# Altium PCB msr50.PcbDoc (part 6 of 8)
Units mil, origin at the board's own origin, x right, y up, seen from the top; angles counter-clockwise.
Board outline 3925 x 3925 mil, 2 copper layers (TopLayer, BottomLayer); 109 components, 122 nets, 846 pads, 52 vias.
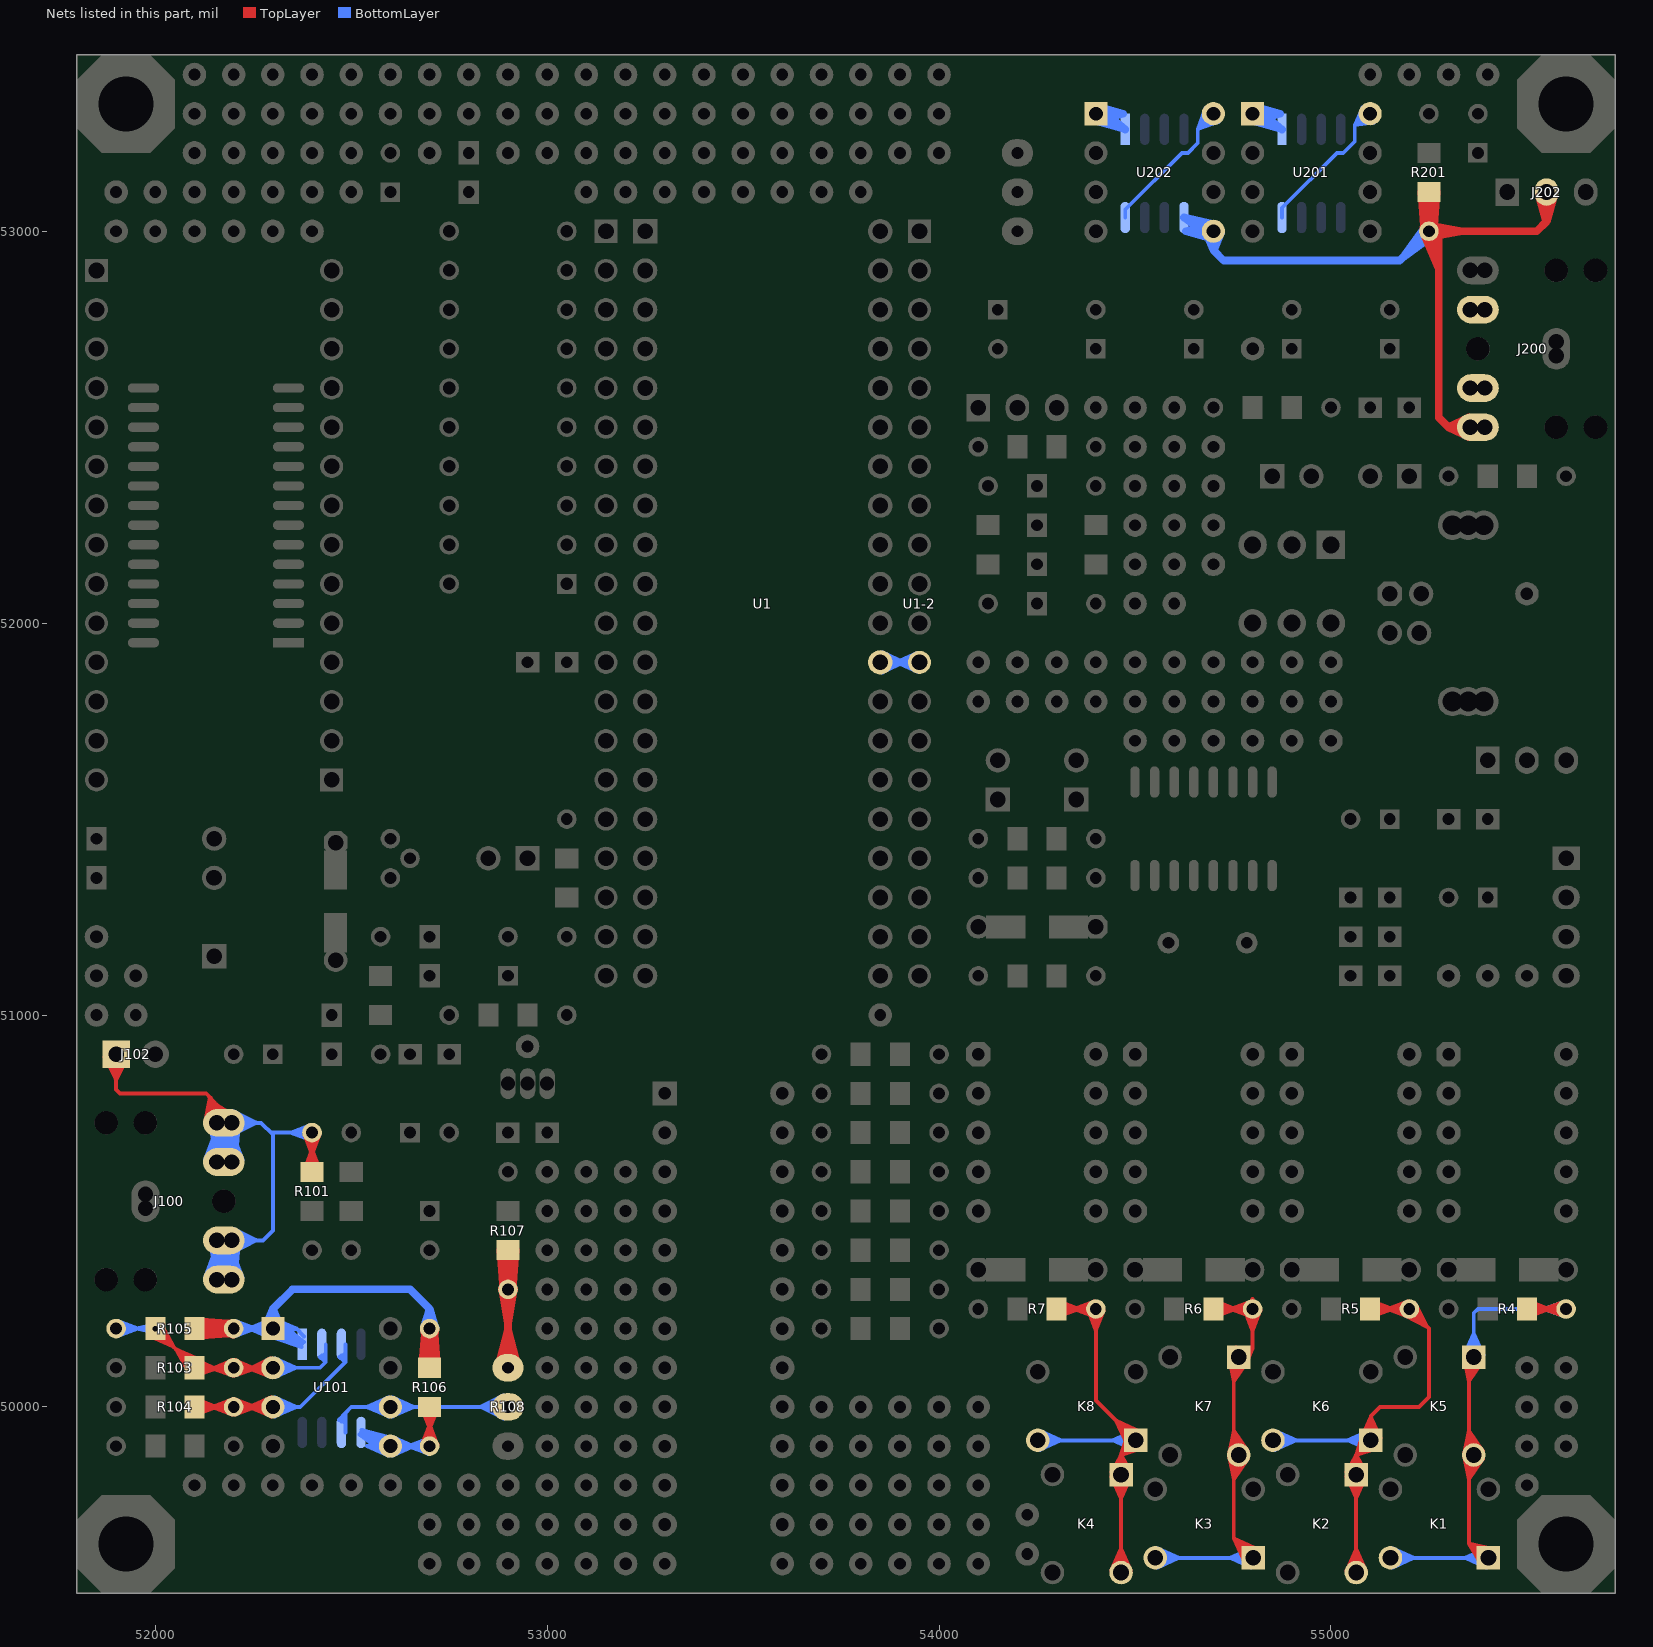
[diagram p6: the nets of this part, all layers, seen from the top]

## Via types
v1: diameter 30, hole 14, TopLayer to BottomLayer, 40 vias
v2: diameter 50, hole 28, TopLayer to BottomLayer, 12 vias

## Nets (pads, with @x,y where several pads share a name; then routed paths per layer and width w, separated by ;. In a path a pad name is that pad's centre, name@x,y a point inside that pad or via, vN(x,y) a via of type N, cw(c..) or ccw(c..) an arc to the next point about the centre after c; other vN are vias at no path point) (continued)
NetJ100_2: (continued)
  BottomLayer w10: J100.4@52164.96,50428.92 52191.14,50368.08 ; J100.2@52164.96,50728.92 52189.05,50672.29 ; J100.2@52164.96,50728.92 52189.08,50672.14 ; J100.2@52164.96,50728.92 52191.14,50668.08 ; 52165.25,50382.86 J100.5@52165.89,50324.46 ; 52165.25,50682.86 J100.3@52165.89,50624.46 ; J100.5@52165.34,50341.79 J100.5@52187.43,50320.87 ; J100.5@52165.36,50341.78 J100.5@52187.47,50320.8 ; J100.5@52165.34,50341.79 J100.5@52187.44,50320.85 ; J100.3@52165.34,50641.79 J100.3@52187.43,50620.87 ; J100.3@52165.36,50641.78 J100.3@52187.47,50620.8 ; J100.3@52165.34,50641.79 J100.3@52187.44,50620.85 ; J100.4@52165.42,50427.85 52181.25,50369.58 ; J100.4@52165.41,50427.87 52181.27,50370.06 ; J100.4@52165.42,50427.85 52180.44,50371.92 ; J100.2@52165.42,50727.85 52181.25,50669.58 ; J100.2@52165.41,50727.87 52181.27,50670.06 ; J100.2@52165.42,50727.85 52180.44,50671.92 ; 52165.6,50374.94 52165.88,50324.31 52165.6,50374.94 ; 52165.6,50374.94 52175.9,50325.37 52165.6,50374.94 ; 52165.6,50374.94 52139.79,50331.39 52165.6,50374.94 ; 52165.6,50374.94 J100.5A@52195,50325 ; 52165.6,50374.94 J100.5@52187.26,50321.19 ; 52165.6,50674.94 52165.88,50624.31 52165.6,50674.94 ; 52165.6,50674.94 52175.9,50625.37 52165.6,50674.94 ; 52165.6,50674.94 52139.79,50631.39 52165.6,50674.94 ; 52165.6,50674.94 J100.3A@52195,50625 ; 52165.6,50674.94 J100.3@52187.26,50621.19 ; J100.5@52165.65,50322.9 52174.92,50377.54 ; J100.5@52165.65,50322.91 52175.55,50380.35 ; J100.5@52165.65,50322.91 52175.55,50380.35 ; J100.5@52165.65,50322.91 52174.89,50377.66 ; J100.5@52165.65,50322.91 52174.89,50377.66 ; J100.3@52165.65,50622.9 52174.92,50677.54 ; J100.3@52165.65,50622.91 52175.55,50680.35 ; J100.3@52165.65,50622.91 52175.55,50680.35 ; J100.3@52165.65,50622.91 52174.89,50677.66 ; J100.3@52165.65,50622.91 52174.89,50677.66 ; 52165.76,50379.83 52165.88,50324.35 52165.76,50379.83 ; 52165.76,50379.83 52175.9,50325.28 52165.76,50379.83 ; 52165.76,50379.83 52139.62,50330.89 52165.76,50379.83 ; 52165.76,50379.83 J100.5A@52195,50325 ; 52165.76,50379.83 J100.5@52187.13,50321.48 ; 52165.76,50379.83 52209.93,50336.12 52169.09,50375.68 ; 52165.76,50679.83 52165.88,50624.35 52165.76,50679.83 ; 52165.76,50679.83 52175.9,50625.28 52165.76,50679.83 ; 52165.76,50679.83 52139.62,50630.89 52165.76,50679.83 ; 52165.76,50679.83 J100.3A@52195,50625 ; 52165.76,50679.83 J100.3@52187.13,50621.48 ; 52165.76,50679.83 52209.93,50636.12 52169.09,50675.68 ; J100.5@52165.79,50323.62 52169.98,50376.33 ; J100.5@52165.79,50323.62 52169.98,50376.33 ; J100.5@52165.79,50323.58 52171.06,50381.53 ; J100.5@52165.79,50323.58 52171.06,50381.53 ; J100.5@52165.79,50323.61 52171.01,50382.36 ; J100.3@52165.79,50623.62 52169.98,50676.33 ; J100.3@52165.79,50623.62 52169.98,50676.33 ; J100.3@52165.79,50623.58 52171.06,50681.53 ; J100.3@52165.79,50623.58 52171.06,50681.53 ; J100.3@52165.79,50623.61 52171.01,50682.36 ; J100.5@52165.84,50323.95 52168.28,50379.15 ; J100.5@52165.84,50323.95 52168.28,50379.15 ; J100.5@52165.84,50323.97 52167.7,50375.34 ; J100.5@52165.84,50323.97 52167.7,50375.34 ; J100.4@52165.84,50426.05 52168.28,50370.85 ; J100.4@52165.84,50426.05 52168.28,50370.85 ; J100.4@52165.84,50426.03 52167.7,50374.66 ; J100.4@52165.84,50426.03 52167.7,50374.66 ; J100.3@52165.84,50623.95 52168.28,50679.15 ; J100.3@52165.84,50623.95 52168.28,50679.15 ; J100.3@52165.84,50623.97 52167.7,50675.34 ; J100.3@52165.84,50623.97 52167.7,50675.34 ; J100.2@52165.84,50726.05 52168.28,50670.85 ; J100.2@52165.84,50726.05 52168.28,50670.85 ; J100.2@52165.84,50726.03 52167.7,50674.66 ; J100.2@52165.84,50726.03 52167.7,50674.66 ; 52166.76,50368.31 52165.87,50425.78 52166.76,50368.31 ; 52166.76,50368.31 52139.66,50418.99 52166.76,50368.31 ; 52166.76,50368.31 52175.91,50425.06 52166.76,50368.31 ; 52166.76,50368.31 J100.4A@52195,50425 ; 52166.76,50368.31 J100.4@52187.04,50428.31 ; 52166.76,50368.31 52202.44,50420.64 52168.28,50370.85 ; 52166.76,50368.31 52177.29,50430.76 52168.72,50374.15 ; 52166.76,50668.31 52165.87,50725.78 52166.76,50668.31 ; 52166.76,50668.31 52139.66,50718.99 52166.76,50668.31 ; 52166.76,50668.31 52175.91,50725.06 52166.76,50668.31 ; 52166.76,50668.31 J100.2A@52195,50725 ; 52166.76,50668.31 J100.2@52187.04,50728.31 ; 52166.76,50668.31 52202.44,50720.64 52168.28,50670.85 ; 52166.76,50668.31 52177.29,50730.76 52168.72,50674.15 ; 52167.7,50374.66 52149.02,50422.55 52167.7,50374.66 ; 52167.7,50374.66 52140.03,50417.98 52167.7,50374.66 ; 52167.7,50374.66 52175.9,50425.41 52167.7,50374.66 ; 52167.7,50374.66 J100.4A@52195,50425 ; 52167.7,50374.66 J100.4@52187.13,50428.53 ; 52167.7,50375.34 52149.02,50327.45 52167.7,50375.34 ; 52167.7,50375.34 52175.9,50324.59 52167.7,50375.34 ; 52167.7,50375.34 52140.03,50332.02 52167.7,50375.34 ; 52167.7,50375.34 J100.5A@52195,50325 ; 52167.7,50375.34 J100.5@52187.13,50321.47 ; 52167.7,50674.66 52149.02,50722.55 52167.7,50674.66 ; 52167.7,50674.66 52140.03,50717.98 52167.7,50674.66 ; 52167.7,50674.66 52175.9,50725.41 52167.7,50674.66 ; 52167.7,50674.66 J100.2A@52195,50725 ; 52167.7,50674.66 J100.2@52187.13,50728.53 ; 52167.7,50675.34 52149.02,50627.45 52167.7,50675.34 ; 52167.7,50675.34 52175.9,50624.59 52167.7,50675.34 ; 52167.7,50675.34 52140.03,50632.02 52167.7,50675.34 ; 52167.7,50675.34 J100.3A@52195,50625 ; 52167.7,50675.34 J100.3@52187.13,50621.47 ; 52168.28,50370.85 52139.92,50418.27 52168.28,50370.85 ; 52168.28,50370.85 52175.9,50425.58 52168.28,50370.85 ; 52168.28,50370.85 J100.4A@52195,50425 ; 52168.28,50370.85 J100.4@52187.02,50428.25 ; 52168.28,50379.15 52175.9,50324.42 52168.28,50379.15 ; 52168.28,50379.15 52139.92,50331.73 52168.28,50379.15 ; 52168.28,50379.15 J100.5A@52195,50325 ; 52168.28,50379.15 52202.44,50329.36 52169.98,50376.33 ; 52168.28,50379.15 J100.5@52187.02,50321.75 ; 52168.28,50670.85 52139.92,50718.27 52168.28,50670.85 ; 52168.28,50670.85 52175.9,50725.58 52168.28,50670.85 ; 52168.28,50670.85 J100.2A@52195,50725 ; 52168.28,50670.85 J100.2@52187.02,50728.25 ; 52168.28,50679.15 52175.9,50624.42 52168.28,50679.15 ; 52168.28,50679.15 52139.92,50631.73 52168.28,50679.15 ; 52168.28,50679.15 J100.3A@52195,50625 ; 52168.28,50679.15 52202.44,50629.36 52169.98,50676.33 ; 52168.28,50679.15 J100.3@52187.02,50621.75 ; 52168.72,50374.15 52149.06,50422.42 52168.72,50374.15 ; 52168.72,50374.15 52165.82,50426.19 52168.72,50374.15 ; 52168.72,50374.15 52140.14,50417.73 52168.72,50374.15 ; 52168.72,50374.15 52175.89,50425.77 52168.72,50374.15 ; 52168.72,50374.15 J100.4A@52195,50425 ; 52168.72,50374.15 J100.4@52187.06,50428.37 ; 52168.72,50674.15 52149.06,50722.42 52168.72,50674.15 ; 52168.72,50674.15 52165.82,50726.19 52168.72,50674.15 ; 52168.72,50674.15 52140.14,50717.73 52168.72,50674.15 ; 52168.72,50674.15 52175.89,50725.77 52168.72,50674.15 ; 52168.72,50674.15 J100.2A@52195,50725 ; 52168.72,50674.15 J100.2@52187.06,50728.37 ; 52169.09,50375.68 52165.81,50323.75 52169.09,50375.68 ; 52169.09,50375.68 52175.88,50324.09 52169.09,50375.68 ; 52169.09,50375.68 52140.2,50332.4 52169.09,50375.68 ; 52169.09,50375.68 J100.5A@52195,50325 ; 52169.09,50375.68 J100.5@52187.05,50321.67 ; 52169.09,50675.68 52165.81,50623.75 52169.09,50675.68 ; 52169.09,50675.68 52175.88,50624.09 52169.09,50675.68 ; 52169.09,50675.68 52140.2,50632.4 52169.09,50675.68 ; 52169.09,50675.68 J100.3A@52195,50625 ; 52169.09,50675.68 J100.3@52187.05,50621.67 ; J100.4@52169.49,50404.1 J100.5@52175,50325 ; J100.4@52169.49,50404.1 J100.5@52185.34,50326.41 ; J100.2@52169.49,50704.1 J100.3@52175,50625 ; J100.2@52169.49,50704.1 J100.3@52185.34,50626.41 ; 52169.69,50378.15 52149.07,50327.62 52171.01,50382.36 ; 52169.69,50678.15 52149.07,50627.62 52171.01,50682.36 ; 52169.98,50376.33 52149.11,50327.75 52169.98,50376.33 ; 52169.98,50376.33 52175.87,50323.78 52169.98,50376.33 ; 52169.98,50376.33 52140.28,50332.59 52169.98,50376.33 ; 52169.98,50376.33 J100.5A@52195,50325 ; 52169.98,50376.33 J100.5@52186.99,50321.82 ; 52169.98,50676.33 52149.11,50627.75 52169.98,50676.33 ; 52169.98,50676.33 52175.87,50623.78 52169.98,50676.33 ; 52169.98,50676.33 52140.28,50632.59 52169.98,50676.33 ; 52169.98,50676.33 J100.3A@52195,50625 ; 52169.98,50676.33 J100.3@52186.99,50621.82 ; 52170.33,50379.86 52165.8,50323.65 52170.33,50379.86 ; 52170.33,50379.86 52149.07,50327.63 52170.33,50379.86 ; 52170.33,50379.86 52175.86,50323.74 52170.33,50379.86 ; 52170.33,50379.86 J100.5A@52195,50325 ; 52170.33,50379.86 J100.5@52186.9,50322.04 ; 52170.33,50679.86 52165.8,50623.65 52170.33,50679.86 ; 52170.33,50679.86 52149.07,50627.63 52170.33,50679.86 ; 52170.33,50679.86 52175.86,50623.74 52170.33,50679.86 ; 52170.33,50679.86 J100.3A@52195,50625 ; 52170.33,50679.86 J100.3@52186.9,50622.04 ; 52171.06,50364.9 J100.4A@52195,50425 ; 52171.06,50364.9 J100.4@52186.8,50427.65 ; 52171.06,50381.53 52175.85,50323.54 52171.06,50381.53 ; 52171.06,50381.53 J100.5A@52195,50325 ; 52171.06,50381.53 52202.68,50328.91 52173.67,50376.54 ; 52171.06,50381.53 J100.5@52186.84,50322.2 ; 52171.06,50664.9 J100.2A@52195,50725 ; 52171.06,50664.9 J100.2@52186.8,50727.65 ; 52171.06,50681.53 52175.85,50623.54 52171.06,50681.53 ; 52171.06,50681.53 J100.3A@52195,50625 ; 52171.06,50681.53 52202.68,50628.91 52173.67,50676.54 ; 52171.06,50681.53 J100.3@52186.84,50622.2 ; 52171.36,50368.23 52149.09,50422.31 52172.17,50365.72 ; 52171.36,50668.23 52149.09,50722.31 52172.17,50665.72 ; 52171.54,50371.29 52149.15,50422.15 J100.5@52176.13,50358.42 ; 52171.54,50671.29 52149.15,50722.15 J100.3@52176.13,50658.42 ; 52173.05,50381.71 52165.74,50323.31 J100.4@52177.71,50405.04 ; 52173.05,50681.71 52165.74,50623.31 J100.2@52177.71,50705.04 ; 52173.34,50373.76 52149.29,50421.77 52173.34,50373.76 ; 52173.34,50373.76 52165.69,50426.91 52173.34,50373.76 ; 52173.34,50373.76 52140.75,50416.43 52173.34,50373.76 ; 52173.34,50373.76 52175.75,50427.4 52173.34,50373.76 ; 52173.34,50373.76 J100.4A@52195,50425 ; 52173.34,50373.76 J100.4@52186.82,50427.73 ; 52173.34,50673.76 52149.29,50721.77 52173.34,50673.76 ; 52173.34,50673.76 52165.69,50726.91 52173.34,50673.76 ; 52173.34,50673.76 52140.75,50716.43 52173.34,50673.76 ; 52173.34,50673.76 52175.75,50727.4 52173.34,50673.76 ; 52173.34,50673.76 J100.2A@52195,50725 ; 52173.34,50673.76 J100.2@52186.82,50727.73 ; 52173.67,50376.54 52165.68,50323.05 52173.67,50376.54 ; 52173.67,50376.54 52149.3,50328.26 52173.67,50376.54 ; 52173.67,50376.54 52175.74,50322.5 52173.67,50376.54 ; 52173.67,50376.54 J100.5A@52195,50325 ; 52173.67,50376.54 J100.5@52186.8,50322.33 ; 52173.67,50676.54 52165.68,50623.05 52173.67,50676.54 ; 52173.67,50676.54 52149.3,50628.26 52173.67,50676.54 ; 52173.67,50676.54 52175.74,50622.5 52173.67,50676.54 ; 52173.67,50676.54 J100.3A@52195,50625 ; 52173.67,50676.54 J100.3@52186.8,50622.33 ; 52174.92,50377.54 J100.5@52175.68,50322.13 ; 52174.89,50377.66 J100.5@52175.68,50322.14 ; 52174.89,50377.66 J100.5@52175.68,50322.14 ; 52174.89,50377.66 J100.5A@52195,50325 ; 52174.89,50377.66 J100.5@52186.73,50322.55 ; 52174.92,50677.54 J100.3@52175.68,50622.13 ; 52174.89,50677.66 J100.3@52175.68,50622.14 ; 52174.89,50677.66 J100.3@52175.68,50622.14 ; 52174.89,50677.66 J100.3A@52195,50625 ; 52174.89,50677.66 J100.3@52186.73,50622.55 ; J100.5@52175,50325 J100.4@52177.71,50405.04 ; J100.5@52175,50325 J100.4@52186.2,50404.66 ; J100.4@52175,50425 J100.4A@52195,50425 ; J100.3@52175,50625 J100.2@52177.71,50705.04 ; J100.3@52175,50625 J100.2@52186.2,50704.66 ; J100.2@52175,50725 J100.2A@52195,50725 ; 52175.55,50380.35 52149.32,50328.3 52175.55,50380.35 ; 52175.55,50380.35 52175.67,50322.07 52175.55,50380.35 ; 52175.55,50380.35 J100.5A@52195,50325 ; 52175.55,50380.35 J100.5@52186.68,50322.75 ; 52175.55,50680.35 52149.32,50628.3 52175.55,50680.35 ; 52175.55,50680.35 52175.67,50622.07 52175.55,50680.35 ; 52175.55,50680.35 J100.3A@52195,50625 ; 52175.55,50680.35 J100.3@52186.68,50622.75 ; 52176.25,50361.98 J100.4A@52195,50425 ; 52176.25,50661.98 J100.2A@52195,50725 ; 52176.47,50370.43 52175.62,50428.27 52176.71,50368.7 ; 52176.47,50670.43 52175.62,50728.27 52176.71,50668.7 ; 52176.91,50381.32 52165.61,50322.76 52176.95,50380.93 ; 52176.91,50681.32 52165.61,50622.76 52176.95,50680.93 ; 52176.96,50382.89 J100.5A@52195,50325 ; 52176.96,50682.89 J100.3A@52195,50625 ; 52177.25,50372.26 52149.48,50421.34 52177.25,50372.26 ; 52177.25,50372.26 52165.56,50427.43 52177.25,50372.26 ; 52177.25,50372.26 52141.2,50415.62 52177.25,50372.26 ; 52177.25,50372.26 52175.55,50428.63 52177.25,50372.26 ; 52177.25,50372.26 J100.4A@52195,50425 ; 52177.25,50372.26 J100.4@52186.64,50427.11 ; 52177.25,50672.26 52149.48,50721.34 52177.25,50672.26 ; 52177.25,50672.26 52165.56,50727.43 52177.25,50672.26 ; 52177.25,50672.26 52141.2,50715.62 52177.25,50672.26 ; 52177.25,50672.26 52175.55,50728.63 52177.25,50672.26 ; 52177.25,50672.26 J100.2A@52195,50725 ; 52177.25,50672.26 J100.2@52186.64,50727.11 ; J100.4@52177.71,50405.04 J100.5@52185.43,50325.33 ; J100.2@52177.71,50705.04 J100.3@52185.43,50625.33 ; 52178.5,50376.79 52165.49,50322.36 52178.6,50377.34 ; 52178.5,50376.79 52175.45,50320.9 52178.6,50377.34 ; 52178.5,50676.79 52165.49,50622.36 52178.6,50677.34 ; 52178.5,50676.79 52175.45,50620.9 52178.6,50677.34 ; 52178.6,50377.34 J100.5A@52195,50325 ; 52178.6,50677.34 J100.3A@52195,50625 ; 52179.28,50369.54 52165.51,50427.59 52181.97,50361.01 ; 52179.28,50369.54 52141.26,50415.52 52182.68,50363.86 ; 52179.28,50669.54 52165.51,50727.59 52181.97,50661.01 ; 52179.28,50669.54 52141.26,50715.52 52182.68,50663.86 ; 52179.36,50367.87 J100.4A@52195,50425 ; 52179.36,50667.87 J100.2A@52195,50725 ; 52180.25,50378.8 52141.54,50334.94 52180.95,50380.03 ; 52180.25,50378.8 J100.5A@52195,50325 ; 52180.25,50678.8 52141.54,50634.94 52180.95,50680.03 ; 52180.25,50678.8 J100.3A@52195,50625 ; 52180.99,50380.64 J100.5A@52195,50325 ; 52180.99,50680.64 J100.3A@52195,50625 ; 52181.25,50369.58 52149.63,50421.02 52181.27,50370.06 ; 52181.25,50369.58 52175.31,50429.67 52182.68,50363.86 ; 52181.25,50669.58 52149.63,50721.02 52181.27,50670.06 ; 52181.25,50669.58 52175.31,50729.67 52182.68,50663.86 ; 52181.3,50369.77 J100.4A@52195,50425 ; 52181.3,50669.77 J100.2A@52195,50725 ; J100.5@52182.09,50359.79 J100.4A@52195,50425 ; J100.3@52182.09,50659.79 J100.2A@52195,50725 ; 52182.71,50379.79 52149.74,50329.18 52182.8,50379.75 ; 52182.71,50379.79 52141.8,50335.35 52182.8,50379.75 ; 52182.71,50679.79 52149.74,50629.18 52182.8,50679.75 ; 52182.71,50679.79 52141.8,50635.35 52182.8,50679.75 ; 52182.74,50375.33 52165.25,50321.71 52183.81,50378.01 ; 52182.74,50675.33 52165.25,50621.71 52183.81,50678.01 ; 52183.26,50383.76 J100.5A@52195,50325 ; 52183.26,50383.76 52186.45,50323.92 52183.81,50378.01 ; 52183.26,50683.76 J100.3A@52195,50625 ; 52183.26,50683.76 52186.45,50623.92 52183.81,50678.01 ; 52183.81,50378.01 J100.5A@52195,50325 ; 52183.81,50678.01 J100.3A@52195,50625 ; 52183.9,50374.71 52174.95,50430.9 52185.24,50370.97 ; 52183.9,50674.71 52174.95,50730.9 52185.24,50670.97 ; 52184.45,50370.8 52165.25,50428.31 52186.92,50364.23 ; 52184.45,50670.8 52165.25,50728.31 52186.92,50664.23 ; 52184.78,50368.55 J100.4A@52195,50425 ; 52184.78,50668.55 J100.2A@52195,50725 ; J100.5@52185.4,50324.22 J100.4@52186.2,50404.66 ; J100.3@52185.4,50624.22 J100.2@52186.2,50704.66 ; 52185.8,50378.73 52165.17,50321.51 52185.94,50378.56 ; 52185.8,50678.73 52165.17,50621.51 52185.94,50678.56 ; 52185.83,50367.34 J100.4A@52195,50425 ; 52185.83,50667.34 J100.2A@52195,50725 ; 52185.94,50378.56 52149.99,50329.6 52186.18,50378.67 ; 52185.95,50379.6 J100.5A@52195,50325 ; 52185.94,50678.56 52149.99,50629.6 52186.18,50678.67 ; 52185.95,50679.6 J100.3A@52195,50625 ; 52186.55,50380.7 J100.5A@52195,50325 ; 52186.55,50680.7 J100.3A@52195,50625 ; J100.5@52186.8,50322.33 52157.76,50316.39 J100.5@52186.84,50322.2 ; J100.4@52186.8,50427.65 52159.3,50416.62 J100.4@52186.82,50427.73 ; J100.4@52186.8,50427.65 52157.77,50433.61 J100.4@52186.82,50427.73 ; J100.3@52186.8,50622.33 52157.76,50616.39 J100.3@52186.84,50622.2 ; J100.2@52186.8,50727.65 52159.3,50716.62 J100.2@52186.82,50727.73 ; J100.2@52186.8,50727.65 52157.77,50733.61 J100.2@52186.82,50727.73 ; J100.5@52187.02,50321.75 52157.59,50316.38 J100.5@52186.99,50321.82 ; J100.4@52187.02,50428.25 52159.45,50416.65 J100.4@52187.04,50428.31 ; J100.3@52187.02,50621.75 52157.59,50616.38 J100.3@52186.99,50621.82 ; J100.2@52187.02,50728.25 52159.45,50716.65 J100.2@52187.04,50728.31 ; J100.4@52187.04,50428.31 52157.57,50433.62 J100.4@52187.06,50428.37 ; J100.4@52187.04,50428.31 52165,50408.05 J100.4@52187.06,50428.37 ; J100.4@52187.06,50428.37 52159.48,50416.66 J100.4@52187.13,50428.53 ; J100.2@52187.04,50728.31 52157.57,50733.62 J100.2@52187.06,50728.37 ; J100.2@52187.04,50728.31 52165,50708.05 J100.2@52187.06,50728.37 ; J100.2@52187.06,50728.37 52159.48,50716.66 J100.2@52187.13,50728.53 ; J100.5@52187.13,50321.47 52157.51,50316.38 J100.5@52187.13,50321.48 ; J100.5@52187.13,50321.47 52159.51,50333.33 J100.5@52187.13,50321.48 ; J100.5@52187.13,50321.47 52160.93,50306.74 J100.5@52187.13,50321.48 ; J100.5@52187.13,50321.47 52165.09,50341.91 J100.5@52187.13,50321.48 ; J100.3@52187.13,50621.47 52157.51,50616.38 J100.3@52187.13,50621.48 ; J100.3@52187.13,50621.47 52159.51,50633.33 J100.3@52187.13,50621.48 ; J100.3@52187.13,50621.47 52160.93,50606.74 J100.3@52187.13,50621.48 ; J100.3@52187.13,50621.47 52165.09,50641.91 J100.3@52187.13,50621.48 ; J100.5@52187.26,50321.19 52159.58,50333.31 J100.5@52187.32,50321.09 ; J100.3@52187.26,50621.19 52159.58,50633.31 J100.3@52187.32,50621.09 ; 52187.28,50376.78 52150.15,50329.85 52188.3,50378.19 ; J100.4@52187.32,50428.92 52159.6,50416.7 J100.4@52187.32,50428.91 ; J100.4@52187.32,50428.92 52157.4,50433.62 J100.4@52187.32,50428.91 ; J100.4@52187.32,50428.92 52165.25,50408.17 J100.4@52187.32,50428.91 ; J100.4@52187.32,50428.92 52160.67,50443.31 J100.4@52187.32,50428.91 ; 52187.28,50676.78 52150.15,50629.85 52188.3,50678.19 ; J100.2@52187.32,50728.92 52159.6,50716.7 J100.2@52187.32,50728.91 ; J100.2@52187.32,50728.92 52157.4,50733.62 J100.2@52187.32,50728.91 ; J100.2@52187.32,50728.92 52165.25,50708.17 J100.2@52187.32,50728.91 ; J100.2@52187.32,50728.92 52160.67,50743.31 J100.2@52187.32,50728.91 ; J100.5@52187.43,50320.87 52157.33,50316.38 J100.5@52187.44,50320.85 ; J100.5@52187.43,50320.87 52160.52,50306.66 J100.5@52187.44,50320.85 ; J100.3@52187.43,50620.87 52157.33,50616.38 J100.3@52187.44,50620.85 ; J100.3@52187.43,50620.87 52160.52,50606.66 J100.3@52187.44,50620.85 ; J100.5@52187.69,50320.42 52157.21,50316.38 J100.5@52187.77,50320.31 ; J100.5@52187.69,50320.42 52159.75,50333.26 J100.5@52187.77,50320.31 ; J100.3@52187.69,50620.42 52157.21,50616.38 J100.3@52187.77,50620.31 ; J100.3@52187.69,50620.42 52159.75,50633.26 J100.3@52187.77,50620.31 ; J100.5@52188.22,50358.46 J100.4A@52195,50425 ; J100.3@52188.22,50658.46 J100.2A@52195,50725 ; 52189.05,50372.29 52142.97,50413.08 52189.08,50372.14 ; 52189.05,50372.29 52174.5,50432.09 52189.08,50372.14 ; 52189.05,50672.29 52142.97,50713.08 52189.08,50672.14 ; 52189.05,50672.29 52174.5,50732.09 52189.08,50672.14 ; 52189.23,50378.46 J100.5A@52195,50325 ; 52189.23,50678.46 J100.3A@52195,50625 ; 52189.67,50369.78 J100.4A@52195,50425 ; 52189.67,50669.78 J100.2A@52195,50725 ; 52190.1,50386.03 J100.5A@52195,50325 ; 52190.1,50686.03 J100.3A@52195,50625 ; 52190.73,50365.44 J100.4A@52195,50425 ; 52190.73,50665.44 J100.2A@52195,50725 ; 52191.58,50381.19 J100.5A@52195,50325 ; 52191.58,50681.19 J100.3A@52195,50625 ; 52192.12,50380.56 J100.5A@52195,50325 ; 52192.12,50680.56 J100.3A@52195,50625 ; 52194.21,50371.21 J100.4A@52195,50425 ; 52194.21,50371.21 52186.4,50424.44 J100.5@52194.82,50357.93 ; 52194.21,50671.21 J100.2A@52195,50725 ; 52194.21,50671.21 52186.4,50724.44 J100.3@52194.82,50657.93 ; 52194.45,50378.71 J100.5A@52195,50325 ; 52194.45,50678.71 J100.3A@52195,50625 ; J100.5@52194.82,50357.93 J100.4A@52195,50425 ; J100.3@52194.82,50657.93 J100.2A@52195,50725 ; J100.5A@52195,50325 52197.6,50379.7 ; J100.5A@52195,50325 52199.76,50383.59 ; J100.5A@52195,50325 J100.4@52195.23,50402.91 ; J100.5A@52195,50325 J100.5@52222.74,50329.98 ; J100.4A@52195,50425 52158.27,50416.43 J100.4A@52195,50425 ; J100.4A@52195,50425 52158.27,50433.57 J100.4A@52195,50425 ; J100.4A@52195,50425 52161.88,50406.95 J100.4A@52195,50425 ; J100.4A@52195,50425 52253.35,50423.44 ; J100.4A@52195,50425 J100.4@52199.79,50395.4 ; J100.4A@52195,50425 52258.15,50425 ; J100.4A@52195,50425 52248.62,50425 ; J100.4A@52195,50425 52249.97,50423.68 ; J100.4A@52195,50425 52249.97,50426.32 ; J100.4A@52195,50425 52253.35,50426.56 ; J100.4A@52195,50425 J100.4@52199.79,50454.6 ; J100.4A@52195,50425 52257.25,50425.46 ; J100.4A@52195,50425 52198.51,50370.79 ; J100.4A@52195,50425 52203.09,50369.42 ; J100.4A@52195,50425 52208.23,50368.44 ; J100.4A@52195,50425 52196.16,50364.11 ; J100.3A@52195,50625 52197.6,50679.7 ; J100.3A@52195,50625 52199.76,50683.59 ; J100.3A@52195,50625 J100.2@52195.23,50702.91 ; J100.3A@52195,50625 J100.3@52222.74,50629.98 ; J100.2A@52195,50725 52158.27,50716.43 J100.2A@52195,50725 ; J100.2A@52195,50725 52158.27,50733.57 J100.2A@52195,50725 ; J100.2A@52195,50725 52161.88,50706.95 J100.2A@52195,50725 ; J100.2A@52195,50725 52249.97,50723.68 ; J100.2A@52195,50725 52253.35,50723.44 ; J100.2A@52195,50725 J100.2@52199.79,50695.4 ; J100.2A@52195,50725 52258.15,50725 ; J100.2A@52195,50725 52248.62,50725 ; J100.2A@52195,50725 52249.97,50726.32 ; J100.2A@52195,50725 52253.35,50726.56 ; J100.2A@52195,50725 J100.2@52199.79,50754.6 ; J100.2A@52195,50725 52257.25,50725.46 ; J100.2A@52195,50725 52198.51,50670.79 ; J100.2A@52195,50725 52203.09,50669.42 ; J100.2A@52195,50725 52208.23,50668.44 ; J100.2A@52195,50725 52196.16,50664.11 ; J100.4@52195.23,50402.91 J100.5@52222.74,50329.98 ; J100.2@52195.23,50702.91 J100.3@52222.74,50629.98 ; 52198.51,50370.79 52203.62,50424.87 J100.4@52199.79,50454.6 ; 52198.51,50670.79 52203.62,50724.87 J100.2@52199.79,50754.6 ; J100.4@52199.79,50395.4 52258.15,50425 ; J100.4@52199.79,50454.6 52258.15,50425 ; J100.2@52199.79,50695.4 52258.15,50725 ; J100.2@52199.79,50754.6 52258.15,50725 ; 52248.62,50425 52195.69,50416.41 52248.62,50425 ; 52248.62,50425 52195.69,50433.59 52248.62,50425 ; 52248.62,50425 52198.23,50406.66 52248.62,50425 ; 52248.62,50425 52198.23,50443.34 52248.62,50425 ; 52248.62,50725 52195.69,50716.41 52248.62,50725 ; 52248.62,50725 52195.69,50733.59 52248.62,50725 ; 52248.62,50725 52198.23,50706.66 52248.62,50725 ; 52248.62,50725 52198.23,50743.34 52248.62,50725
NetJ200_2: J200.2 J200.2A J200.2B J202.2 R201.1 R201.3 U202.5 U202.15 | length 5376.4
  TopLayer w20: R201.3@55230.47,53100.15 R201.1@55237.47,53014.83 ; R201.3@55234.47,53098.58 55250,53014.41 R201.3@55265.53,53098.58 ; R201.1@55235.06,53001.32 55250,53085 R201.1@55264.94,53001.32 ; R201.1@55235.84,52995.06 55275,52905.56 ; R201.3@55238.63,53097.03 R201.1@55262.53,53014.83 ; R201.3@55246.06,53100 R201.1@55237.47,53014.83 ; R201.3@55250,53100 R201.1@55250,53000 ; R201.1@55251.32,52985.06 55335,53000 R201.1@55251.32,53014.94 ; R201.3@55253.94,53100 R201.1@55262.53,53014.83 ; R201.3@55261.37,53097.03 R201.1@55237.47,53014.83 ; R201.1@55264.75,53002.71 55275,52905.56 ; R201.3@55269.53,53100.15 R201.1@55262.53,53014.83 ; 55275,53000 55275,52525 55300,52500 ; J200.2@55351.64,52475.2 55300,52500 ; J200.2@55351.64,52524.8 55300,52500 ; J200.2@55357.28,52500 55300,52500 ; J200.2@55385.66,52488.35 J200.2@55357.46,52513.4 ; J200.2@55385.66,52511.65 J200.2@55357.46,52486.6 ; J200.2@55395.18,52486.6 J200.2@55357.46,52486.6 ; J200.2@55395.18,52513.4 J200.2@55357.46,52513.4 ; J202.2@55530.21,53092.14 55550,53025 ; J202.2@55550,53095 55550,53025 ; J202.2@55550,53100 55550,53025 ; J202.2@55569.79,53092.14 55550,53025 ; R201.1@55250,53000 55275,52905.56 ; R201.1@55250,53000 55525,53000 55550,53025 ; 55300,52500 J200.2A@55355,52500 ; 55300,52500 J200.2@55353.31,52513.52 ; 55300,52500 J200.2@55353.31,52486.48 ; 55300,52500 J200.2A@55355,52500 ; 55300,52500 J200.2@55353.31,52513.52 ; 55300,52500 J200.2@55353.31,52486.48 ; 55300,52500 J200.2A@55355,52500 ; 55300,52500 J200.2@55353.31,52513.52 ; 55300,52500 J200.2@55353.31,52486.48 ; 55300,52500 J200.2@55353.31,52513.52 ; 55300,52500 J200.2@55353.31,52486.48 ; 55300,52500 J200.2A@55355,52500 ; J200.2A@55355,52500 55390.26,52513.4 J200.2A@55355,52500 ; J200.2A@55355,52500 55390.26,52486.6 J200.2A@55355,52500 ; J200.2A@55355,52500 J200.2B@55392.72,52500 ; J200.2A@55355,52500 J200.2B@55392.72,52500 ; J200.2A@55355,52500 J200.2@55375,52500 J200.2B@55392.72,52500 ; J200.2@55357.46,52486.6 J200.2B@55392.72,52500 ; J200.2@55357.46,52513.4 J200.2B@55392.72,52500
  BottomLayer w20: U202.5@54680.92,52995.84 54700.69,52951 ; U202.5@54719.19,52996.38 54700.69,52951 ; R201.1@55238.59,53009.74 55182.57,52932.57 ; R201.1@55259.74,52988.59 55182.57,52932.57 ; U202.15@54625,53035 54697.28,53019.34 U202.15@54630,53000 ; U202.15@54625,53035 54697.28,52980.66 U202.15@54630,53000 ; U202.15@54625,53035 U202.5@54700,53000 ; U202.15@54630,53000 U202.5@54700,53000 ; U202.5@54700,53000 54700.69,52951 ; U202.5@54700,53000 54700.69,52999.31 54700.69,52951 ; 54700.69,52951 54726.69,52925 55175,52925 R201.1@55250,53000 55182.57,52932.57
NetJ200_3: J200.3 J200.3A J200.3B
NetJ200_4: J200.4 J200.4A J200.4B
NetK1_1: K1.1 K1.4 K5.1 K5.4 R4.1 R4.3 | length 3886.4
  TopLayer w10: K5.1@55339.38,50127.38 55351.88,50065.18 ; K5.4@55349.42,49876.18 55351.88,49939.34 ; K5.4@55349.42,49878.58 55351.88,49815.49 ; K5.1@55349.42,50128.58 55351.88,50065.18 ; K5.1@55351.88,50127.38 55351.88,49652.38 ; K5.1@55364.38,50127.38 55351.88,50065.18 ; K5.4@55378.62,49872.69 55351.88,49815.49 ; K5.4@55378.62,49882.07 55351.88,49939.34 ; K5.1@55378.63,50122.71 55351.88,50065.18 ; K1.1@55383.18,49598.29 55351.88,49652.38 ; K5.4@55387.42,49867.68 55351.88,49815.49 ; K5.4@55387.42,49887.08 55351.88,49939.34 ; K5.1@55387.43,50117.72 55351.88,50065.18 ; K1.1@55391.5,49604.05 55351.88,49652.38 ; K1.1@55409.37,49627.88 55351.88,49652.38 ; K1.1@55412.57,49637.48 55351.88,49652.38 ; R4.3@55500,50250 R4.1@55600,50250 ; R4.3@55501.01,50239.46 55555.59,50250 ; R4.3@55501.01,50260.54 55555.59,50250 ; R4.3@55503.81,50229.77 55555.59,50250 ; R4.3@55503.81,50270.23 55555.59,50250 ; R4.1@55596.36,50230.33 55545,50250 ; R4.1@55596.36,50269.67 55545,50250 ; R4.1@55599.09,50240.04 55545,50250 ; R4.1@55599.09,50259.96 55545,50250 ; 55351.88,49652.38 K1.1@55401.88,49614.88 55389.38,49614.88 55351.88,49652.38 ; 55351.88,49815.49 K5.4@55364.38,49877.38 55351.88,49939.34 ; 55351.88,49815.49 55339.38,49877.38 55351.88,49939.34
  BottomLayer w10: K1.4@55151.88,49614.88 K1.1@55401.88,49614.88 ; K1.4@55153.75,49600 55211.88,49614.88 ; K1.4@55153.75,49629.76 55211.88,49614.88 ; K1.4@55157.08,49590.43 55211.88,49614.88 ; K1.4@55157.08,49639.33 55211.88,49614.88 ; K5.1@55339.92,50132.59 55364.38,50187.38 ; K5.1@55349.49,50129.26 55364.38,50187.38 ; K5.1@55364.38,50127.38 55364.38,50239.38 55375,50250 R4.1@55600,50250 ; K5.1@55379.26,50129.26 55364.38,50187.38 ; K5.1@55388.83,50132.59 55364.38,50187.38 ; K1.1@55396.67,49590.43 55341.88,49614.88 ; K1.1@55396.67,49639.33 55341.88,49614.88 ; K1.1@55400,49600 55341.88,49614.88 ; K1.1@55400,49629.76 55341.88,49614.88 ; R4.1@55596.36,50230.33 55545,50250 ; R4.1@55596.36,50269.67 55545,50250 ; R4.1@55599.09,50240.04 55545,50250 ; R4.1@55599.09,50259.96 55545,50250
NetK2_1: K2.1 K2.4 K6.1 K6.4 R5.1 R5.3 | length 3530.1
  TopLayer w10: K2.4@55039.92,49582.59 55064.38,49637.38 ; K2.1@55039.92,49822.17 55064.38,49767.38 ; K2.1@55040.17,49833.63 55064.38,49877.38 ; K2.4@55049.49,49579.26 55064.38,49637.38 ; K2.1@55049.49,49825.51 55064.38,49767.38 ; K2.1@55049.54,49829.63 55064.38,49877.38 ; K2.4@55064.38,49577.38 K2.1@55064.38,49827.38 55064.38,49877.38 ; K6.1@55077.42,49920.09 55101.88,49974.88 ; K2.1@55079.21,49829.63 55064.38,49877.38 ; K2.4@55079.26,49579.26 55064.38,49637.38 ; K2.1@55079.26,49825.51 55064.38,49767.38 ; K6.1@55080.53,49927.9 55064.38,49877.38 ; K6.1@55086.99,49916.76 55101.88,49974.88 ; K2.1@55088.58,49833.63 55064.38,49877.38 ; K2.4@55088.83,49582.59 55064.38,49637.38 ; K2.1@55088.83,49822.17 55064.38,49767.38 ; K6.1@55089.88,49923.88 55064.38,49877.38 ; R5.3@55100,50250 R5.1@55200,50250 ; R5.3@55101.01,50239.46 55155.59,50250 ; R5.3@55101.01,50260.54 55155.59,50250 ; R5.3@55103.81,50229.77 55155.59,50250 ; R5.3@55103.81,50270.23 55155.59,50250 ; K6.1@55110.88,49902.88 55064.38,49877.38 ; K6.1@55114.89,49893.54 55064.38,49877.38 ; K6.1@55116.76,49916.76 55101.88,49974.88 ; K6.1@55126.33,49920.09 55101.88,49974.88 ; R5.1@55188.19,50233.86 55246.21,50203.79 ; R5.1@55193.49,50242.41 55246.21,50203.79 ; R5.1@55196.36,50230.33 55145,50250 ; R5.1@55196.36,50269.67 55145,50250 ; R5.1@55199.09,50240.04 55145,50250 ; R5.1@55199.09,50259.96 55145,50250 ; R5.1@55207.59,50256.51 55246.21,50203.79 ; R5.1@55216.14,50261.81 55246.21,50203.79 ; 55225,50225 R5.1@55200,50250 ; 55064.38,49877.38 K6.1@55101.88,49914.88 55101.88,49976.88 55125,50000 55225,50000 55250,50025 55250,50200 R5.1@55200,50250
  BottomLayer w10: K6.4@54851.88,49914.88 K6.1@55101.88,49914.88 ; K6.4@54853.75,49900 54911.88,49914.88 ; K6.4@54853.75,49929.76 54911.88,49914.88 ; K6.4@54857.08,49890.43 54911.88,49914.88 ; K6.4@54857.08,49939.33 54911.88,49914.88 ; K6.1@55096.67,49890.43 55041.88,49914.88 ; K6.1@55096.67,49939.33 55041.88,49914.88 ; K6.1@55100,49900 55041.88,49914.88 ; K6.1@55100,49929.76 55041.88,49914.88
NetK3_1: K3.1 K3.4 K7.1 K7.4 R6.1 R6.3 | length 3683.5
  TopLayer w10: R6.3@54700,50250 R6.1@54800,50250 54800,50195 ; R6.3@54701.01,50239.46 54755.59,50250 ; R6.3@54701.01,50260.54 54755.59,50250 ; R6.3@54703.81,50229.77 54755.59,50250 ; R6.3@54703.81,50270.23 54755.59,50250 ; K7.1@54739.38,50127.38 54751.88,50065.19 ; K7.4@54749.42,49876.18 54751.88,49939.34 ; K7.4@54749.42,49878.58 54751.88,49815.52 ; K7.1@54749.42,50128.58 54751.88,50065.19 ; K7.1@54751.88,50127.38 54751.88,49664.88 ; K7.1@54757.83,50151.51 54800,50150 ; K7.1@54758.71,50141.27 54800,50150 ; K7.1@54774.54,50116.35 54800,50150 ; K7.1@54775,50125 54800,50150 ; K7.4@54778.62,49872.69 54751.88,49815.52 ; K7.4@54778.62,49882.07 54751.88,49939.34 ; K7.1@54778.63,50122.71 54751.88,50065.19 ; R6.1@54780.33,50246.36 54800,50195 ; K3.1@54781.35,49600.61 54751.88,49664.88 ; K7.1@54783.43,50111.19 54800,50150 ; K7.4@54787.41,49867.68 54751.88,49815.52 ; K7.4@54787.42,49887.08 54751.88,49939.34 ; K7.1@54787.43,50117.72 54751.88,50065.19 ; R6.1@54790.04,50249.09 54800,50195 ; K3.1@54790.2,49605.46 54751.88,49664.88 ; R6.1@54796.36,50230.33 54745,50250 ; R6.1@54796.36,50269.67 54745,50250 ; R6.1@54799.09,50240.04 54745,50250 ; R6.1@54799.09,50259.96 54745,50250 ; 54800,50275 54800,50150 ; K3.1@54801.88,49614.88 54751.88,49664.88 ; R6.1@54809.96,50249.09 54800,50195 ; K3.1@54811.3,49626.55 54751.88,49664.88 ; K3.1@54816.15,49635.41 54751.88,49664.88 ; R6.1@54819.67,50246.36 54800,50195 ; 54751.88,49815.52 K7.4@54764.38,49877.38 54751.88,49939.34 ; 54751.88,49815.52 54739.38,49877.38 54751.88,49939.34 ; 54751.88,50065.19 K7.1@54764.38,50127.38 54800,50150
  BottomLayer w10: K3.4@54551.88,49614.88 K3.1@54801.88,49614.88 ; K3.4@54553.75,49600 54611.88,49614.88 ; K3.4@54553.75,49629.76 54611.88,49614.88 ; K3.4@54557.08,49590.43 54611.88,49614.88 ; K3.4@54557.08,49639.33 54611.88,49614.88 ; K3.1@54796.67,49590.43 54741.88,49614.88 ; K3.1@54796.67,49639.33 54741.88,49614.88 ; K3.1@54800,49600 54741.88,49614.88 ; K3.1@54800,49629.76 54741.88,49614.88
NetK4_1: K4.1 K4.4 K8.1 K8.4 R7.1 R7.3 | length 3654.5
  TopLayer w10: R7.3@54300,50250 R7.1@54400,50250 ; R7.3@54301.01,50239.46 54355.59,50250 ; R7.3@54301.01,50260.54 54355.59,50250 ; R7.3@54303.81,50229.77 54355.59,50250 ; R7.3@54303.81,50270.23 54355.59,50250 ; R7.1@54380.33,50246.36 54400,50195 ; R7.1@54380.4,50246 54400,50200 ; R7.1@54390.05,50249 54400,50200 ; R7.1@54390.04,50249.09 54400,50195 ; R7.1@54396.36,50230.33 54345,50250 ; R7.1@54396.36,50269.67 54345,50250 ; R7.1@54399.09,50240.04 54345,50250 ; R7.1@54399.09,50259.96 54345,50250 ; R7.1@54409.95,50249 54400,50200 ; R7.1@54409.96,50249.09 54400,50195 ; R7.1@54419.6,50246 54400,50200 ; R7.1@54419.67,50246.36 54400,50195 ; K4.4@54439.92,49582.59 54464.38,49637.38 ; K4.1@54439.92,49822.17 54464.38,49767.38 ; K4.1@54440.17,49833.63 54464.38,49877.38 ; K4.4@54449.49,49579.26 54464.38,49637.38 ; K4.1@54449.49,49825.51 54464.38,49767.38 ; K4.1@54449.54,49829.63 54464.38,49877.38 ; K4.4@54464.38,49577.38 K4.1@54464.38,49827.38 54464.38,49877.38 ; K4.1@54479.21,49829.63 54464.38,49877.38 ; K4.4@54479.26,49579.26 54464.38,49637.38 ; K4.1@54479.26,49825.51 54464.38,49767.38 ; K8.1@54480.53,49927.9 54464.38,49877.38 ; K8.1@54481.41,49900.52 54450.66,49966.1 ; K4.1@54488.58,49833.63 54464.38,49877.38 ; K4.4@54488.83,49582.59 54464.38,49637.38 ; K4.1@54488.83,49822.17 54464.38,49767.38 ; K8.1@54489.88,49923.88 54464.38,49877.38 ; K8.1@54490.23,49905.43 54450.66,49966.1 ; K8.1@54510.88,49902.88 54464.38,49877.38 ; K8.1@54511.33,49926.53 54450.66,49966.1 ; K8.1@54514.89,49893.54 54464.38,49877.38 ; K8.1@54516.24,49935.35 54450.66,49966.1 ; 54400,50200 R7.1@54400,50250 ; R7.1@54400,50250 54400,50016.76 54425,49991.76 54434.85,49981.91 K8.1@54501.88,49914.88 54464.38,49877.38
  BottomLayer w10: K8.4@54251.88,49914.88 K8.1@54501.88,49914.88 ; K8.4@54253.75,49900 54311.88,49914.88 ; K8.4@54253.75,49929.76 54311.88,49914.88 ; K8.4@54257.08,49890.43 54311.88,49914.88 ; K8.4@54257.08,49939.33 54311.88,49914.88 ; K8.1@54496.67,49890.43 54441.88,49914.88 ; K8.1@54496.67,49939.33 54441.88,49914.88 ; K8.1@54500,49900 54441.88,49914.88 ; K8.1@54500,49929.76 54441.88,49914.88
NetR103_1: R103.1 R103.3 R105.1 R105.3 U101.2 U101.12 | length 3877
  TopLayer w10: R105.3@51988.74,50178.82 52046.8,50153.2 ; R105.3@51993.36,50192.52 52040.82,50157.07 ; R105.3@51993.52,50187.68 52046.8,50153.2 ; R105.3@51993.52,50192.38 52040,50159.42 ; R105.3@51993.58,50192.33 52040.21,50159.79 R105.3@52007.67,50206.42 ; R105.3@51993.71,50192.23 52041.55,50159.94 ; R105.3@51993.73,50192.21 52044.13,50158.04 ; R105.3@52000,50196.06 52046.8,50153.2 ; R105.3@52007.46,50206.66 52044.13,50158.04 ; R105.3@52007.54,50206.57 52041.55,50159.94 ; R105.3@52007.71,50206.37 52040,50159.42 ; R105.3@52007.78,50203.25 52046.8,50153.2 ; R105.3@52007.8,50206.25 52040.82,50157.07 ; R105.3@52016.19,50208.79 52046.8,50153.2 ; R103.3@52083.81,50091.21 52053.2,50146.8 ; R103.3@52092.22,50096.75 52053.2,50146.8 ; R103.3@52100,50103.94 52053.2,50146.8 ; R103.3@52100.55,50089.42 52155.68,50097.62 ; R103.3@52101.46,50110.49 52155.68,50097.62 ; R103.3@52102.93,50079.62 52155.68,50097.62 ; R103.3@52104.67,50120.06 52155.68,50097.62 ; R103.3@52106.48,50112.32 52053.2,50146.8 ; R103.3@52111.26,50121.18 52053.2,50146.8 ; R103.1@52195.52,50119.49 52144.94,50097.62 ; R103.1@52197.23,50080.19 52144.94,50097.62 ; R103.1@52198.66,50109.91 52144.94,50097.62 ; R103.1@52199.52,50090.01 52144.94,50097.62 ; R103.1@52200.48,50090.01 52255.06,50097.62 ; R103.1@52201.34,50109.91 52255.06,50097.62 ; R103.1@52202.77,50080.19 52255.06,50097.62 ; R103.1@52204.48,50119.49 52255.06,50097.62 ; U101.2@52294,50123.78 52240.41,50097.62 ; U101.2@52295.92,50075.81 52240.41,50097.62 ; U101.2@52297.66,50114.34 52240.41,50097.62 ; U101.2@52298.81,50085.52 52240.41,50097.62 ; U101.2@52300,50100 52240.41,50097.62 ; U101.2@52302.62,50097.62 52102.38,50097.62 R103.3@52100,50100 ; v1(52000,50200) 52040,50159.42 ; v1(52000,50200) 52040.82,50157.07 ; v1(52000,50200) 52041.55,50159.94 ; v1(52000,50200) 52044.13,50158.04 ; v1(52000,50200) R103.3@52100,50100 ; R103.3@52100,50100 52155.68,50097.62 ; 52144.94,50097.62 R103.1@52200,50100 52255.06,50097.62
  BottomLayer w10: R105.1@51900,50200 v1(52000,50200) ; R105.1@51900.91,50190.04 51955,50200 ; R105.1@51900.91,50209.96 51955,50200 ; R105.1@51903.64,50180.33 51955,50200 ; R105.1@51903.64,50219.67 51955,50200 ; v1@51998.98,50190.05 51951,50200 v1@51998.98,50209.95 ; U101.2@52300,50100 52359.53,50100 ; U101.2@52301.77,50085.58 52359.53,50100 ; U101.2@52301.77,50114.42 52359.53,50100 ; U101.2@52305.05,50076 52359.53,50100 ; U101.2@52305.05,50124 52359.53,50100 ; U101.2@52310,50100 52420,50100 52435,50115 ; U101.12@52419.69,50127.44 52435,50115 ; U101.12@52425,50132 52435,50115 ; U101.12@52431.57,50134.42 52435,50115 ; U101.12@52435,50160 52435,50115
NetR104_1: R104.1 R104.3 U101.3 U101.13 | length 1778
  TopLayer w10: R104.3@52100,50000 R104.1@52200,50000 U101.3@52290.23,50000 ; R104.3@52101.01,49989.46 52155.59,50000 ; R104.3@52101.01,50010.54 52155.59,50000 ; R104.3@52103.81,49979.77 52155.59,50000 ; R104.3@52103.81,50020.23 52155.59,50000 ; R104.1@52196.36,49980.33 52145,50000 ; R104.1@52196.36,50019.67 52145,50000 ; R104.1@52199.09,49990.04 52145,50000 ; R104.1@52199.09,50009.96 52145,50000 ; R104.1@52200.91,49990.04 52255,50000 ; R104.1@52200.91,50009.96 52255,50000 ; R104.1@52203.64,49980.33 52255,50000 ; R104.1@52203.64,50019.67 52255,50000 ; U101.3@52294.95,49976 52240.47,50000 ; U101.3@52294.95,50024 52240.47,50000 ; U101.3@52298.23,49985.58 52240.47,50000 ; U101.3@52298.23,50014.42 52240.47,50000 ; U101.3@52300,50000 52240.47,50000 ; U101.3@52300.23,50000 U101.3@52302.62,49997.62
  BottomLayer w10: U101.3@52300,50000 52359.53,50000 ; U101.3@52301.77,49985.58 52359.53,50000 ; U101.3@52301.77,50014.42 52359.53,50000 ; U101.3@52305.05,49976 52359.53,50000 ; U101.3@52305.05,50024 52359.53,50000 ; U101.3@52310,50000 52370,50000 52485,50115 ; U101.13@52469.69,50127.44 52485,50115 ; U101.13@52475,50132 52485,50115 ; U101.13@52481.57,50134.42 52485,50115 ; U101.13@52485,50160 52485,50115
NetR105_2: R105.2 R105.4 R106.1 R106.3 U101.1 U101.11 | length 5493
  TopLayer w20: R105.4@52099.85,50180.47 R105.2@52185.17,50187.47 ; R105.4@52099.85,50219.53 R105.2@52185.17,50212.53 ; R105.4@52100,50196.06 R105.2@52185.17,50187.47 ; R105.4@52100,50203.94 R105.2@52185.17,50212.53 ; R105.4@52102.97,50188.63 R105.2@52185.17,50212.53 ; R105.4@52102.97,50211.37 R105.2@52185.17,50187.47 ; R105.2@52198.68,50185.06 R105.4@52115,50200 ; R105.2@52198.68,50214.94 R105.4@52115,50200 ; R106.3@52680.47,50099.85 R106.1@52687.47,50185.17 ; R106.3@52684.47,50101.42 52700,50185.59 R106.3@52715.53,50101.42 ; R106.1@52685.06,50198.68 52700,50115 R106.1@52714.94,50198.68 ; R106.3@52688.63,50102.97 R106.1@52712.53,50185.17 ; R106.3@52696.06,50100 R106.1@52687.47,50185.17 ; R106.3@52700,50100 R106.1@52700,50200 ; R106.3@52703.94,50100 R106.1@52712.53,50185.17 ; R106.3@52711.37,50102.97 R106.1@52687.47,50185.17 ; R106.3@52719.53,50099.85 R106.1@52712.53,50185.17 ; R105.4@52115,50200 R105.2@52200,50200 R105.4@52100,50200 R105.2@52185.59,50200 ; R105.2@52185.59,50200 52101.42,50184.47 R105.2@52185.59,50200 ; R105.2@52185.59,50200 52101.42,50215.53 R105.2@52185.59,50200
  BottomLayer w10: R105.2@52200,50200 U101.1@52300,50200 ; R105.2@52200.91,50190.04 52255,50200 ; R105.2@52200.91,50209.96 52255,50200 ; R105.2@52203.64,50180.33 52255,50200 ; R105.2@52203.64,50219.67 52255,50200 ; U101.1@52294.95,50176 52240.47,50200 ; U101.1@52294.95,50224 52240.47,50200 ; U101.1@52298.23,50185.58 52240.47,50200 ; U101.1@52298.23,50214.42 52240.47,50200 ; U101.1@52305.05,50224 52359.53,50200 ; U101.11@52370.08,50155.02 U101.1@52305.33,50223.88 ; U101.11@52370.61,50154.55 U101.1@52301.77,50214.42 ; U101.11@52371.06,50154.21 U101.1@52310,50200 ; U101.11@52371.45,50153.96 U101.1@52300,50200 ; U101.11@52372.4,50153.5 U101.1@52301.77,50185.58 ; U101.11@52373.11,50153.26 U101.1@52305.05,50176 ; U101.11@52376.23,50166.89 U101.1@52305.05,50176 ; U101.11@52377.01,50166.71 U101.1@52301.77,50185.58 ; U101.11@52378.04,50166.31 U101.1@52300,50200 ; U101.11@52378.39,50166.12 U101.1@52310,50200 ; U101.11@52378.96,50165.77 U101.1@52301.77,50214.42 ; U101.11@52379.54,50165.33 U101.1@52305.33,50223.88 ; U101.11@52380,50180 52360,50200 U101.1@52310,50200 ; U101.1@52300,50200 U101.11@52375,50160 ; U101.1@52300,50200 52359.53,50200 ; U101.1@52301.77,50185.58 U101.11@52375,50160 ; U101.1@52301.77,50185.58 52359.53,50200 ; U101.1@52301.77,50214.42 U101.11@52375,50160 ; U101.1@52301.77,50214.42 52359.53,50200 ; U101.1@52305.05,50176 U101.11@52375,50160 ; U101.1@52305.05,50176 52359.53,50200 ; U101.1@52305.33,50223.88 U101.11@52375,50160 ; U101.1@52310,50200 U101.11@52375,50160
  BottomLayer w20: U101.1@52280.88,50203.95 52300.46,50250.46 ; U101.1@52300,50200 52300.46,50250.46 ; U101.1@52300.46,50200.46 52300.46,50250.46 ; U101.1@52310,50200 U101.1@52310.46,50200.46 ; U101.1@52319.19,50203.61 52300.46,50250.46 ; R106.1@52685.17,50202.25 52700,50250 ; R106.1@52700,50200 52700,50250 ; 52700,50225 52700,50250 ; R106.1@52714.83,50202.25 52700,50250 ; 52300.46,50250.46 52350.46,50300.46 52650,50300.46 52650,50300 52700,50250
NetR106_2: R106.2 R106.4 U101.5 U101.15 | length 2992.3
  TopLayer w10: R106.4@52679.77,49996.19 52700,49944.41 ; R106.2@52680.33,49903.64 52700,49955 ; R106.4@52689.46,49998.99 52700,49944.41 ; R106.2@52690.04,49900.91 52700,49955 ; R106.2@52699.54,49900.46 R106.2@52700,49900 R106.4@52700,50000 ; R106.2@52709.96,49900.91 52700,49955 ; R106.4@52710.54,49998.99 52700,49944.41 ; R106.2@52719.67,49903.64 52700,49955 ; R106.4@52720.23,49996.19 52700,49944.41
  BottomLayer w10: U101.15@52520.63,49929.53 U101.5@52590.91,49877.78 ; U101.15@52521.27,49929.08 U101.5@52595.9,49886.16 ; U101.15@52523.42,49928.18 U101.5@52598.23,49914.42 ; U101.15@52524.26,49928.04 U101.5@52594.95,49924 ; U101.15@52526.43,49941.85 U101.5@52594.95,49924 ; U101.15@52527.2,49941.64 U101.5@52598.23,49914.42 ; U101.15@52528.22,49941.22 U101.5@52600.21,49900 ; U101.15@52528.23,49941.21 U101.5@52600,49900 ; U101.15@52529.2,49940.6 U101.5@52595.9,49886.16 ; U101.15@52529.8,49940.1 U101.5@52590.91,49877.78 ; 52540,49900 52610,49900 U101.5@52605,49905 ; U101.5@52594.95,49876 52540.47,49900 ; U101.5@52598.23,49885.58 52540.47,49900 ; U101.5@52600.91,49900 R106.2@52700,49900 ; U101.5@52601.77,49885.58 52659.53,49900 ; U101.5@52601.77,49914.42 52659.53,49900 ; U101.5@52605.05,49876 52659.53,49900 ; U101.5@52605.05,49924 52659.53,49900 ; R106.2@52696.36,49880.33 52645,49900 ; R106.2@52696.36,49919.67 52645,49900 ; R106.2@52699.09,49890.04 52645,49900 ; R106.2@52699.09,49909.96 52645,49900 ; U101.15@52525,49935 U101.5@52594.95,49924 ; U101.15@52525,49935 U101.5@52600,49900 ; U101.15@52525,49935 U101.5@52598.23,49914.42 ; U101.15@52525,49935 U101.5@52595.9,49886.16 ; U101.15@52525,49935 U101.5@52590.91,49877.78 ; U101.15@52525,49935 U101.5@52600.21,49900 ; 52540.47,49900 U101.5@52600,49900 ; 52540.47,49900 U101.5@52598.23,49914.42 ; 52540.47,49900 U101.5@52594.95,49924 ; U101.5@52600,49900 52522.31,49928.54 U101.5@52600.21,49900 ; U101.5@52600,49900 52659.53,49900
NetR107_1: R107.1 R107.3 R108.3 | length 1824.8
  TopLayer w10: R107.1@52880.4,50304 52900,50350 ; R107.1@52890.05,50301 52900,50350 ; R107.1@52900,50290 52900,50350 ; R107.1@52900,50300 52900,50350 ; R107.1@52909.95,50301 52900,50350 ; R107.1@52919.6,50304 52900,50350
  TopLayer w20: R108.3@52875.22,50103.29 52900,50195 R108.3@52924.78,50103.29 ; R107.3@52880.47,50400.15 R107.1@52887.47,50314.83 ; R107.3@52884.47,50398.58 52900,50314.41 R107.3@52915.53,50398.58 ; R107.1@52885.06,50298.68 52900,50215 R107.1@52914.94,50298.68 ; R107.1@52885.06,50301.32 52900,50385 R107.1@52914.94,50301.32 ; R107.3@52888.63,50397.03 R107.1@52912.53,50314.83 ; R107.3@52896.06,50400 R107.1@52887.47,50314.83 ; R108.3@52900,50100 R107.3@52900,50400 ; R107.3@52903.94,50400 R107.1@52912.53,50314.83 ; R107.3@52911.37,50397.03 R107.1@52887.47,50314.83 ; R107.3@52919.53,50400.15 R107.1@52912.53,50314.83
NetR108_2: R108.2 U101.6 U101.16 | length 1544.5
  BottomLayer w10: U101.16@52469.11,49966.79 52485,49985 ; U101.16@52475,49963 52485,49985 ; U101.16@52481.72,49961.06 52485,49985 ; U101.16@52485,49935 52485,49985 ; U101.6@52594.95,49976 52540.47,50000 ; U101.6@52594.95,50024 52540.47,50000 ; U101.6@52598.23,49985.58 52540.47,50000 ; U101.6@52598.23,50014.42 52540.47,50000 ; U101.6@52601.77,49985.58 52659.53,50000 ; U101.6@52601.77,50014.42 52659.53,50000 ; U101.6@52605.05,49976 52659.53,50000 ; U101.6@52605.05,50024 52659.53,50000 ; U101.6@52610,50000 52500,50000 52485,49985 ; R108.2@52888.08,49970.81 52830,50000 ; R108.2@52888.08,50029.19 52830,50000 ; R108.2@52891.92,49980.24 52830,50000 ; R108.2@52891.92,50019.76 52830,50000 ; R108.2@52894.23,49990.03 52830,50000 ; R108.2@52894.23,50009.97 52830,50000 ; R108.2@52895,50000 52830,50000 ; R108.2@52900,50000 U101.6@52600,50000 52540.47,50000
NetU1-2_12: U1-2.12 U1.29 | length 704.1
  BottomLayer w10: U1.29@53850,51900 U1-2.12@53950,51900 ; U1.29@53850.3,51894.01 53911,51900 ; U1.29@53850.3,51905.99 53911,51900 ; U1.29@53852.1,51884.14 53911,51900 ; U1.29@53852.1,51915.86 53911,51900 ; U1.29@53855.54,51874.6 53911,51900 ; U1.29@53855.54,51925.4 53911,51900 ; U1-2.12@53944.95,51876 53890.47,51900 ; U1-2.12@53944.95,51924 53890.47,51900 ; U1-2.12@53948.23,51885.58 53890.47,51900 ; U1-2.12@53948.23,51914.42 53890.47,51900
NetU201_1: U201.1 U201.11 | length 463.7
  BottomLayer w20: 54870,53300 54802.72,53280.66 U201.11@54875,53260 ; 54870,53300 54802.72,53319.34 U201.11@54875,53260 ; 54870,53300 U201.1@54800,53300 U201.11@54875,53260
NetU201_8: U201.8 U201.18 | length 619.4
  BottomLayer w10: U201.18@54875,53035 54875,53060 55015.15,53200.15 55031.33,53200.15 55060.59,53229.41 55060.59,53270.59 ; U201.8@55080.89,53315.38 55060.59,53270.59 ; U201.8@55089.69,53310.23 55060.59,53270.59 ; U201.8@55106.87,53287.2 55060.59,53270.59 ; U201.8@55109.3,53277.31 55060.59,53270.59 ; 55060.59,53270.59 U201.8@55100,53300 55090,53300 55060.59,53270.59
NetU202_1: U202.1 U202.11 | length 463.7
  BottomLayer w20: 54470,53300 54402.72,53280.66 U202.11@54475,53260 ; 54470,53300 54402.72,53319.34 U202.11@54475,53260 ; 54470,53300 U202.1@54400,53300 U202.11@54475,53260
NetU202_8: U202.8 U202.18 | length 593.3
  BottomLayer w10: U202.18@54475,53035 54475,53055 54620,53200 54635,53200 54660,53225 54660,53260 ; U202.8@54679.31,53313.17 54660,53260 ; U202.8@54688.49,53308.87 54660,53260 ; U202.8@54700,53300 54660,53260 ; U202.8@54708.87,53288.49 54660,53260 ; U202.8@54713.17,53279.31 54660,53260